# Altium PCB PCB_sonnn_2_2025-09-09.pcbdoc (part 2 of 2)
Units mm, origin at the board's own origin, x right, y up, seen from the top; angles counter-clockwise.
Board outline 165.65 x 105.65 mm, 2 copper layers (Top Layer, Bottom Layer); 104 components, 42 nets, 251 pads, 109 vias.
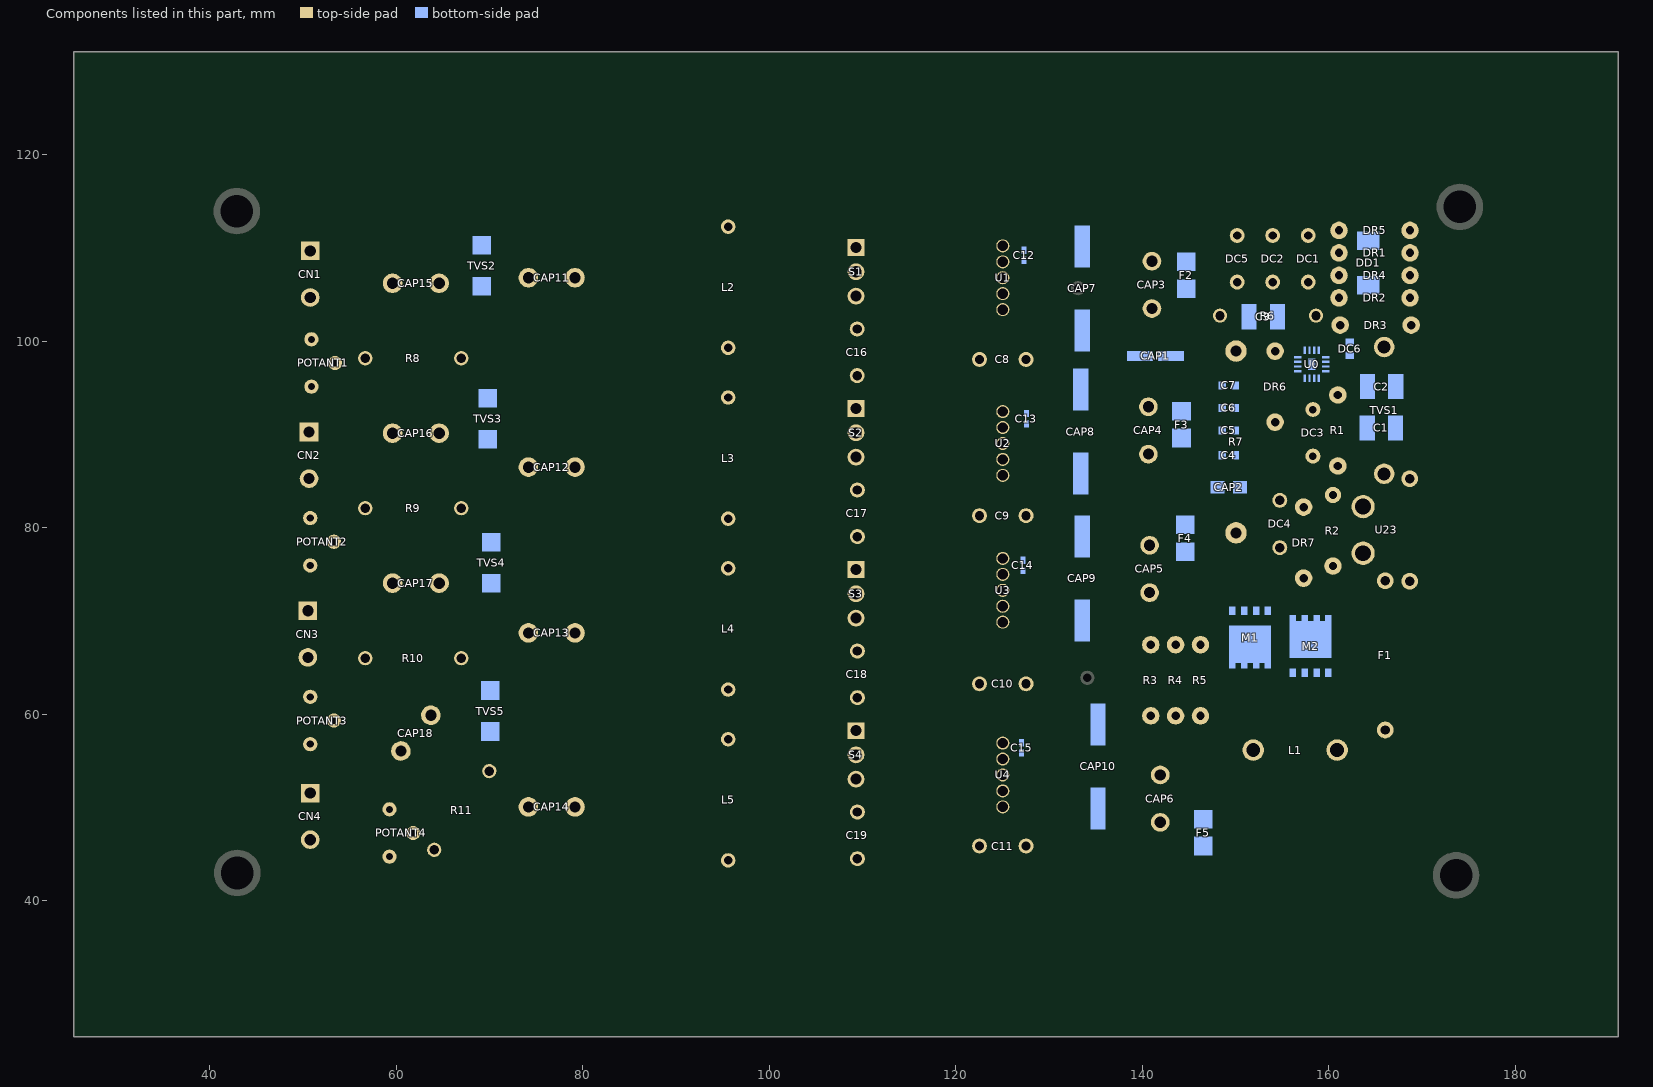
[diagram p2: the components of this part, seen from the top]

## Other copper
Top Layer:
  region net R4_2: 159.611,84.918 159.611,87.052 159.624,87.064 159.408,87.064 157.846,85.502
  region net R4_2: 158.531,85.185 158.696,84.982 158.531,85.147 158.531,85.185
  region net R4_2: 156.664,87.458 156.664,86.506 156.868,86.302 155.928,86.302 155.788,86.442
  region net R4_2: 159.903,88.131 159.117,88.917 160.424,88.779 159.903,88.258 159.903,88.131
  region net R2_1: 162.652,89.01 162.652,89.391 162.816,89.554 162.816,90.262 163.106,90.552 163.106,89.899 164.303,88.702
  region net R2_1: 163.189,86.458 163.189,87.232 165.366,88.111 164.03,88.301 163.113,88.541 163.062,88.541 161.906,87.385
  region net GND: 53.853,107.559 53.853,107.693 57.997,111.837 57.93,107.359 57.796,107.225
  region net GND: 114.832,106.667 114.832,106.601 118.308,103.125 114.297,103.125 114.163,102.991
  region net GND: 59.071,53.106 63.116,53.106 63.21,53.2 63.21,53.389 61.328,55.27
  region net GND: 54.736,60.366 58.406,60.058 58.474,59.991 58.474,59.754 57.932,55.825 56.658,55.533 54.541,54.348 55.68,56.215 55.527,57.993
  region net GND: 66.438,55.725 67.764,57.051 67.697,55.981 67.764,55.914 66.438,55.725
  region net GND: 105.515,50.83 108.026,53.335 107.726,50.078 107.867,49.937
  region net GND: 104.784,64.139 102.803,64.139 102.092,63.428 102.092,58.678 103.692,57.078 104.708,57.078 104.835,57.205
  region net GND: 90.866,63.955 90.96,63.955 93.97,66.965 90.301,66.965 89.925,67.342
  region net GND: 110.715,63.861 113.349,66.495 113.349,63.955 112.973,63.579
  region net GND: 90.801,70.144 90.707,70.238 90.662,74.846 95.364,70.144 90.801,70.144
  region net GND: 110.228,76.87 111.027,76.87 112.485,78.328 112.485,76.776 112.533,76.729
  region net GND: 114.461,68.592 114.298,72.988 118.6,68.686 114.555,68.686 114.461,68.592
  region net GND: 114.298,72.988 114.273,73.013 114.273,73.672 114.298,72.988
  region net VIN: 168.368,97.781 167.225,97.73 170.628,99.229 170.603,97.527 170.781,97.349
  region net VIN: 158.654,95.681 159.2,95.803 159.257,95.926 159.059,95.926 158.824,96.161
  region net ISNS+: 155.756,94.002 157.077,94.002 157.204,93.875 156.874,93.875 156.391,93.392
  region net ISNS+: 153.47,93.85 155.4,93.85 155.451,93.9 155.299,93.9 154.435,94.764
  region net U4_2: 56.539,43.286 55.999,43.673 55.967,44.822 61.567,49.922 63.367,49.922 67.067,47.022 67.053,44.011 66.332,43.213
  region net POTANT1_1: 62.767,107.022 63.367,107.622 63.467,107.622 69.667,107.622 70.467,106.822 70.467,106.522 70.467,103.922 69.367,102.722 63.367,102.722 62.767,103.322 62.767,103.422
  region net POTANT4_1: 64.967,64.322 70.167,64.422 71.367,63.722 71.367,61.722 70.867,61.222 67.967,61.222 65.167,58.222 63.367,58.222 62.467,59.122 62.667,62.222
  region net POTANT3_1: 64.167,80.722 71.067,80.722 71.767,79.522 71.767,77.222 71.267,76.722 68.867,76.722 66.467,73.622 65.367,72.422 62.967,72.422 63.067,79.522
  region net POTANT2_1: 64.167,96.922 70.067,96.922 71.667,95.522 71.667,92.522 71.167,92.022 68.267,92.022 66.367,90.122 66.367,88.922 65.267,87.722 62.867,87.722 62.967,95.422
  region net GND: 74.16,82.328 88.978,82.328 88.978,71.787 88.966,71.609 76.659,71.66 74.217,74.103 74.852,74.738
  region net GND: 74.795,91.853 74.16,92.488 74.16,102.521 88.47,102.521 88.978,103.029 88.978,91.853 74.795,91.853
  region net GND: 112.346,113.443 114.839,113.472 115.413,112.785 115.394,109.887 111.838,109.887 111.584,109.633
  region net GND: 111.965,77.375 112.346,110.014 115.394,110.014 114.905,84.884 117.223,80.207 115.229,77.801 112.381,77.712 112.286,77.154 111.772,77.185
  region net GND: 108.266,109.109 112.727,109.125 112.727,113.189 112.473,113.443 105.166,113.459 104.766,112.909 104.766,111.959 105.742,110.649 106.758,110.649
  region net GND: 113.743,50.832 126.466,50.809 126.467,47.922 123.067,43.522 113.489,43.466 113.108,43.847 111.076,45.879 109.933,45.879 107.266,48.546 112.473,48.546 114.427,46.677
  region net GND: 113.743,70.644 125.808,70.644 126.316,70.644 126.697,70.263 127.459,69.501 127.459,67.088 127.459,66.326 125.427,64.294 125.427,62.135 123.522,60.23 113.87,60.23 113.743,60.357 113.743,61.119
  region net GND: 116.301,86.374 126.189,86.392 127.078,85.503 127.078,83.344 123.903,80.169 115.013,80.169 114.378,80.804 114.378,82.836 114.166,84.509 114.417,85.387
  region net GND: 113.87,95.663 124.467,95.722 125.967,97.422 125.967,99.522 126.367,100.022 126.697,100.616 126.951,100.87 126.961,103.584 126.406,104.125 114.683,104.122 113.616,103.156 113.616,102.267 113.997,101.886
  region net GND: 61.579,106.082 62.256,107.657 63.205,108.351 61.274,108.995 61.037,108.757 60.665,108.757 60.597,108.69
  region net GND: 70.418,108.724 71.299,108.724 72.653,107.369 72.653,108.994 72.416,109.232
  region net GND: 72.789,105.439 75.937,105.87 77.587,103.839
  region net GND: 84.924,104.592 85.865,104.592 88.123,106.85 88.123,103.369 87.464,102.71
  region net GND: 84.736,109.39 87.653,107.79 87.653,110.519
  region net GND: 76.016,107.441 78.887,109.523 75.381,109.523 75.178,109.727
  region net GND: 61.041,93.37 60.878,106.578 61.132,106.832 58.719,106.832 56.433,104.546 56.433,95.275 56.941,94.767
  region net GND: 61.223,82.883 61.223,74.175 60.134,73.086 58.864,73.086 56.869,75.082 56.869,79.618 56.869,84.516 60.497,88.145 60.497,87.724 61.558,86.663
  region net GND: 76.131,87.757 76.131,87.884 78.417,90.17 76.131,90.17 75.242,91.059
  region net GND: 83.751,91.186 88.704,86.233 88.704,90.932 88.323,91.313 88.323,90.805 88.45,90.678
  region net GND: 85.021,81.915 85.021,82.677 87.688,85.344 87.688,81.407 88.323,80.772 87.815,80.772 87.18,80.137
  region net GND: 75.242,84.582 75.242,84.455 78.925,80.772 74.734,80.772 74.607,80.645
  region net GND: 76.047,68.302 76.047,71.124 77.787,72.865 73.836,72.865 73.037,72.281
  region net GND: 82.743,72.21 83.496,72.21 88.199,67.506 88.199,72.586 87.541,73.245
  region net GND: 82.038,60.733 84.06,60.733 88.764,65.437 88.764,62.097 84.907,58.24
  region net GND: 76.653,49.856 76.541,54.809 79.056,56.003 71.22,56.892 70.687,56.358
  region net GND: 82.586,56.385 83.245,56.385 86.255,53.374 86.255,56.761 85.973,57.043
  region net GND: 91.729,59.54 92.202,53.861 95.212,50.851 89.756,50.851 89.285,50.381 89.745,56.593
  region net GND: 105.605,66.726 108.201,68.79 106.604,68.79 106.005,69.389
  region net GND: 90.875,82.479 90.875,83.514 93.368,86.007 91.863,86.007 90.452,87.418
  region net GND: 103.879,83.849 103.879,83.316 104.21,82.986 104.514,82.986 104.997,82.503 106.927,82.503 107.613,83.189 107.613,83.29 105.175,85.729
  region net GND: 103.067,87.939 105.135,88.507 105.969,88.505 105.835,88.015 104.87,87.05
  region net GND: 110.23,91.84 111.583,91.653 112.418,90.973 112.418,92.751 111.928,93.241 110.132,93.241 110.041,93.15 110.041,93.132 107.126,92.004
  region net GND: 103.242,96.8 103.242,93.716 105.074,91.883 108.358,91.883 108.521,92.047
  region net GND: 110.286,98.684 111.405,98.684 111.829,99.107 111.829,99.314 112.45,99.935 112.45,97.123 112.544,97.028
  region net GND: 110.763,103.256 110.303,102.915 111.092,102.315 111.847,101.636 112.36,101.224 112.36,103.764 112.85,104.254
  region net GND: 110.857,105.717 112.478,107.189 112.478,105.32 111.498,104.34 111.498,104.957 110.954,105.502
  region net GND: 111.314,109.209 111.441,109.209 112.53,108.12 112.53,109.372 112.203,109.699
  region net GND: 111.129,88.253 111.129,88.431 112.323,89.625 112.323,88.152 112.145,87.974
  region net GND: 114.914,89.252 114.914,88.169 117.048,86.035 116.269,86.035 114.846,84.613 114.846,84.714
  region net GND: 114.914,93.046 117.962,97.753 114.508,97.753 114.169,97.414
  region net GND: 109.289,54.031 110.983,54.256 112.272,55.122 112.968,52.864 112.234,52.13
  region net GND: 110.833,57.202 112.274,56.006 112.328,57.737 112.347,57.756
  region net GND: 110.758,68.598 112.815,66.541 112.815,68.674 112.282,69.208
  region net GND: 110.733,71.214 110.733,71.265 112.612,73.145 112.612,70.96 112.257,70.605
  region net GND: 112.307,73.45 112.307,73.475 111.139,74.643 112.206,74.643 112.536,74.974
  region net GND: 110.646,82.965 110.646,82.39 112.272,80.764 112.272,83.372 112.678,83.778
  region net GND: 114.871,56.562 118.775,60.466 115.765,60.466 114.636,61.595
  region net GND: 114.636,53.834 114.636,53.787 118.634,49.788 114.683,49.788 114.025,49.13
  region net R5_2: 135.008,66.921 135.008,66.78 137.925,63.864 134.397,63.864 134.115,64.146
  region net ISNS-: 143.334,70.637 144.087,70.637 146.203,72.754 146.203,70.214 146.109,70.12
  region net GND: 141.251,72.153 142.711,72.153 144.502,73.944 141.924,73.944 141.911,73.931
Mid-Layer 1:
  region net U1_2: 49.166,95.809 49.666,95.809 53.366,99.509 54.066,99.509 54.866,98.709 54.866,94.609 54.766,94.509 53.266,93.009 49.366,93.009 48.466,93.909 48.466,95.309 48.966,95.809
  region net POTANT2_2: 49.039,76.632 49.539,76.632 53.239,80.332 53.939,80.332 54.739,79.532 54.736,77.215 55.241,76.288 56.665,74.871 53.139,73.832 49.239,73.832 48.339,74.732 48.339,76.132 48.839,76.632
  region net U3_2: 49.039,57.455 49.539,57.455 53.239,61.155 53.939,61.155 55.586,60.559 54.739,56.255 54.639,56.155 53.139,54.655 49.239,54.655 48.339,55.555 48.339,56.955 48.839,57.455
  region net U4_2: 56.473,43.297 55.978,43.729 55.966,44.809 61.566,49.909 63.366,49.909 68.374,46.21 68.366,44.781 66.966,43.309
  region net R2_1: 164.166,60.109 164.166,57.409 165.666,55.909 165.666,55.009 165.666,51.409 164.366,50.109 156.266,50.109 154.766,51.609 154.766,52.659 154.266,53.009 152.266,53.009 152.166,52.909 152.166,48.409 152.166,43.109 162.066,43.109 166.316,43.109 169.766,46.459 169.819,59.581 166.369,66.77 165.782,62.751 164.529,62.751 164.166,60.609 164.166,60.409 164.166,59.009
  region net R2_1: 152.266,48.509 152.266,43.109 150.477,43.109 149.366,44.261 149.466,49.109 141.266,56.809 138.266,59.809 138.266,62.409 138.566,62.709 141.666,62.709 142.166,62.209 142.166,61.109 142.166,58.817 148.866,52.609 151.866,52.609 152.266,53.009 152.266,48.509
  region net C4_2: 147.724,104.498 146.542,102.798 146.445,104.724 146.671,104.498 147.724,104.498
  region net C4_2: 146.276,102.419 146.276,103.049 146.326,103.099 146.276,102.419
  region net C4_2: 144.461,105.498 146.753,105.649 149.884,104.596 145.629,104.596 145.439,104.787
  region net C4_2: 155.823,104.121 156.312,103.811 156.384,103.344 156.136,102.978 157.714,102.806 157.523,104.101 157.523,104.114
  region net C4_2: 147.965,96.008 151.098,96.008 151.361,95.744 150.223,95.744 149.799,95.321 148.868,95.321 148.539,94.992
  region net C4_2: 147.886,93.29 150.132,94.061 152.272,96.172 152.272,97.087 152.297,97.112 152.196,97.1 151.561,96.465 151.561,96.287 151.129,95.855 148.411,95.855 147.979,95.423
  region net R5_2: 147.281,60.677 147.294,60.677 151.281,58.366 151.281,60.55 150.418,61.414
  region net R5_2: 149.146,63.95 151.323,63.333 149.835,62.698 149.618,62.916
  region net C4_2: 147.447,79.273 147.447,75.04 146.194,73.787 146.194,75.853 144.636,77.411
Mid-Layer 2:
  region net C4_2: 142.866,105.909 143.366,106.409 145.666,106.409 146.666,105.409 146.666,102.709 145.766,101.609 143.566,101.609 142.866,102.309 142.866,105.809 142.866,105.909
  region net C4_2: 148.866,95.909 149.066,95.709 149.066,87.409 148.866,87.209 147.666,87.209 144.866,87.309 142.566,88.709 142.566,90.109 143.166,90.809 146.966,90.809 146.966,95.409 147.466,95.909
  region net C4_2: 155.324,66.055 160.424,66.055 160.524,65.955 160.524,66.055 161.024,66.555 161.024,70.255 159.924,71.355 159.924,72.355 159.524,72.755 156.224,72.755 155.027,73.377 155.024,71.555 154.327,70.527 155.027,69.927 155.127,66.577
  region net C4_2: 143.466,78.909 142.866,78.509 142.866,77.709 141.966,76.609 141.966,76.209 146.066,76.209 146.766,76.809 146.766,78.409 146.166,78.909
  region net C4_2: 145.666,46.509 144.066,46.509 143.666,46.009 143.666,43.609 144.166,43.109 147.966,43.109 148.166,43.309 148.366,43.509 148.366,46.109 147.966,46.509
  region net R5_2: 148.666,68.909 149.266,69.709 149.366,69.809 153.866,69.809 154.227,69.177 154.227,62.527 154.166,62.009 154.112,59.116 153.464,58.483 145.766,58.509 144.966,59.409 144.966,59.609 144.866,59.709 144.866,61.909 145.866,62.909 145.866,64.909 146.166,65.209 147.766,65.209 148.666,66.009 148.666,66.209
  region net R2_1: 165.079,97.287 164.864,97.42 163.666,97.409 163.227,96.877 163.227,90.327 161.598,88.06 161.191,87.848 160.759,87.946 160.39,87.804 160.054,87.479 159.657,86.732 159.666,85.909 159.666,85.809 160.366,85.109 162.066,85.109 162.566,85.609 162.566,86.409 163.066,86.909 163.166,87.209 165.166,89.209
  region net POTANT1_1: 63.616,108.259 70.466,108.009 71.366,107.109 71.366,104.009 75.066,104.009 76.566,105.509 76.566,108.109 76.866,108.409 81.266,108.409 82.766,106.909 85.866,106.909 91.066,101.709 105.166,101.709 106.166,102.709 110.966,102.709 112.766,100.909 112.766,99.609 111.366,98.209 99.666,98.209 98.266,96.809 88.366,96.809 82.766,102.409 78.866,102.409 76.466,100.009 72.266,100.009 70.866,101.409 65.016,101.359 62.216,103.859 62.066,109.707
  region net POTANT2_1: 47.366,91.409 48.966,93.009 52.366,93.009 54.366,91.009 54.743,88.891 54.366,88.409 54.166,88.209 54.066,88.209 52.766,86.909 49.166,86.909 48.466,87.609 48.454,87.633 47.366,88.609 47.366,89.809
  region net POTANT2_1: 47.566,81.509 49.166,83.109 51.194,83.376 52.866,83.109 52.966,83.009 54.34,82.313 54.293,80.913 53.891,80.341 52.966,80.209 51.566,78.809 48.166,78.809 47.46,79.609
  region net POTANT2_1: 62.966,90.409 62.966,94.709 64.666,96.409 70.866,96.409 72.766,94.509 88.266,84.109 99.366,82.009 110.066,81.809 111.766,80.709 112.016,78.366 111.305,77.636 92.066,77.909 77.466,84.409 77.366,88.309 72.266,91.709 67.266,91.709 67.266,88.811 64.565,86.11 62.966,86.109
  region net POTANT3_1: 47.366,71.809 48.666,73.109 52.566,73.109 54.516,70.759 54.066,69.309 52.366,68.309 48.966,68.309 49.066,64.709 52.366,64.709 54.366,63.909 54.366,61.409 50.566,58.709 47.366,58.709
  region net F2_2: 124.766,112.609 124.066,112.209 124.066,111.409 124.266,111.209 126.466,111.209 126.466,110.209 126.766,109.909 127.666,109.909 128.728,108.971 128.766,101.109 126.266,101.109 126.366,96.009 126.716,95.659 131.566,98.309 131.528,111.735 130.942,112.281 128.166,112.309 127.766,112.609
  region net U2_5: 128.766,95.209 128.766,87.409 128.666,87.309 128.666,84.809 126.466,82.609 124.766,80.909 124.766,80.609 126.066,79.309 129.066,79.309 129.766,80.009 129.766,80.809 130.866,81.909 130.866,92.109 131.466,92.709 131.466,96.209 131.366,96.309 130.666,96.309
  region net F4_2: 125.066,64.909 125.066,65.309 128.666,68.909 128.666,75.409 128.666,76.309 127.666,77.609 128.866,78.709 131.066,78.209 131.166,78.209 131.966,77.409 131.966,72.709 132.066,72.609 132.066,65.209 131.366,64.509 131.366,62.909 129.266,60.809 125.966,60.809 125.566,61.209 125.566,62.509 125.066,63.009
  region net F5_2: 127.566,56.709 127.566,59.409 128.566,60.409 130.466,60.409 130.666,60.409 131.766,59.309 131.766,55.009 131.766,43.909 131.466,43.609 126.066,43.609 125.666,44.009 125.663,47.021 125.837,47.199 127.366,47.209 127.566,47.409
  region net S2_2: 107.666,91.209 108.116,91.359 110.166,91.359 110.616,90.959 110.666,89.409 110.216,88.959 108.066,88.959 107.666,89.209
  region net POTANT1_1: 56.196,104.774 56.196,106.857 58.228,108.889 55.002,108.915 53.783,110.134
  region net POTANT1_1: 53.275,107.746 50.836,107.695 49.058,106.908 48.779,107.518 51.776,110.312
  region net POTANT2_1: 61.419,87.456 63.688,88.844 63.688,87.659 63.248,87.219
  region net POTANT2_1: 55.569,88.201 57.296,88.201 58.515,86.982 57.347,86.982 56.483,86.118
  region net POTANT2_1: 52.622,86.956 53.105,86.956 53.994,86.067 53.994,85.432 53.207,84.645 53.029,84.645 52.851,84.467
  region net POTANT2_1: 67.005,90.747 67.005,90.772 68.402,92.169 67.209,92.169 66.751,92.626
  region net GND: 117.596,80.772 117.914,81.952 117.596,82.843 116.707,83.462 119.227,84.041 119.227,83.965 121.196,81.996
  region net GND: 106.159,61.046 109.308,61.046 109.359,61.097 109.359,58.099 109.283,58.023 105.168,58.023 104.381,58.811
  region net GND: 104.685,53.223 107.764,53.41 108.372,53.871 109.208,53.958 109.181,49.057 109.537,48.701 104.736,48.701 104.127,49.311 103.314,50.124 103.314,52.562 103.923,53.172
  region net GND: 109.225,58.199 111.67,58.199 114.916,61.444 110.542,61.444 109.883,62.103
  region net GND: 109.695,53.307 110.071,53.307 112.141,51.237 112.094,51.19 109.93,49.027
  region net GND: 119.704,84.812 119.704,85.015 121.024,86.336 125.122,86.336 125.563,85.895 124.851,85.895 121.668,82.712 121.6,82.644
  region net GND: 122.583,101.145 123.147,101.145 125.123,103.12 123.241,103.12 122.724,103.638 122.677,103.591
  region net F2_2: 126.27,101.09 126.288,101.09 130.007,104.809 130.007,101.053 129.191,100.237
  region net GND: 136.061,90.867 136.061,88.092 136.014,88.045 134.412,83.332 136.061,84.564 135.873,84.376 136.014,84.376 139.824,88.186 139.777,88.186
  region net GND: 119.248,48.509 123.457,48.509 123.493,48.472 123.493,48.164 121.28,45.951
  region net GND: 122.402,104.025 118.271,104.025 117.627,104.669 116.848,104.669 115.9,103.721 115.9,103.585 116.43,103.177 118.203,103.111 121.86,99.453
  region net GND: 119.156,95.288 119.156,101.206 122.026,98.158 119.156,95.288
  region net GND: 119.079,95.059 119.079,95.212 119.156,95.288 119.156,95.135 119.079,95.059
  region net GND: 78.16,99.098 79.938,100.876 82.503,100.876 85.069,98.31 85.069,97.142 85.704,96.507 85.704,96.202 85.831,96.075 85.831,95.085 85.323,94.577 81.132,94.577 77.474,98.234
  region net GND: 104.978,83.106 109.55,83.106 110.498,84.055 108.771,84.055 107.01,85.816
  region net GND: 109.55,85.917 109.652,85.917 111.379,84.19 108.873,84.19 108.636,84.427
  region net GND: 104.636,94.24 105.009,94.24 106.566,95.798 108.971,95.798 109.005,95.764 109.005,93.631 108.903,93.529
  region net R2_1: 158.927,76.227 158.927,75.277 159.727,74.477 161.227,74.477 161.977,75.227 161.977,76.677 160.627,78.027 160.227,78.027 157.877,80.377 156.577,80.627 155.577,81.577 154.227,81.577 153.277,82.327 153.327,83.627 154.327,84.527 158.877,84.527 159.177,84.827 160.077,84.827 160.377,85.127 160.377,87.127 160.077,87.427 160.027,87.427 159.227,86.627 152.177,86.477 151.277,85.927 151.227,81.627 152.527,80.177 155.627,79.127 156.877,78.127
Bottom Layer:
  region net U4_2: 56.527,43.127 55.927,43.677 55.966,44.809 61.566,49.909 63.366,49.909 67.066,47.009 67.027,44.127 66.427,43.077
  region net POTANT1_1: 62.766,107.009 63.366,107.609 63.466,107.609 69.666,107.609 70.466,106.809 70.466,106.509 70.466,103.909 69.366,102.709 63.366,102.709 62.766,103.309 62.766,103.409
  region net POTANT4_1: 64.966,64.309 70.166,64.409 71.366,63.709 71.366,61.709 70.866,61.209 67.966,61.209 65.166,58.209 63.366,58.209 62.466,59.109 62.666,62.209
  region net POTANT3_1: 64.166,80.709 71.066,80.709 71.766,79.509 71.766,77.209 71.266,76.709 68.866,76.709 66.466,73.609 65.366,72.409 63.377,72.427 62.927,72.927 63.066,79.509
  region net POTANT2_1: 64.166,96.909 70.066,96.909 71.666,95.509 71.666,92.509 71.166,92.009 68.266,92.009 66.366,90.109 66.366,88.909 65.266,87.709 63.227,87.727 62.877,88.177 62.966,95.409
  region net GND: 72.677,82.127 88.977,82.316 88.977,71.775 88.966,71.609 76.658,71.648 74.216,74.09 72.027,73.927 71.427,75.327 73.027,76.727
  region net GND: 74.794,91.841 74.159,92.476 74.159,102.509 88.469,102.509 88.977,103.017 88.977,91.841 74.794,91.841
  region net GND: 112.345,113.431 114.677,113.427 115.377,112.777 115.393,109.875 111.837,109.875 111.583,109.621
  region net GND: 111.964,77.363 112.345,110.002 115.393,110.002 115.393,77.363 111.964,77.363
  region net GND: 106.884,74.188 106.884,47.01 102.566,47.01 102.566,112.31 103.466,113.409 106.376,113.431 106.757,113.05 106.757,74.569 106.884,74.188
  region net GND: 108.266,109.109 112.726,109.113 112.726,113.177 112.472,113.431 105.216,113.459 104.766,112.909 104.766,111.959 105.741,110.637 106.757,110.637
  region net R2_1: 160.107,77.097 159.366,76.609 159.366,75.609 159.766,75.109 159.766,73.409 160.566,72.509 160.566,71.809 162.166,70.209 162.266,68.309 162.266,66.709 162.266,65.209 162.266,63.109 162.266,59.009 162.566,58.709 163.266,58.109 164.166,57.409 169.866,57.909 169.966,70.009 168.566,71.509 165.866,71.509 164.966,71.509 161.547,75.96 161.295,76.851
  region net C4_2: 155.366,65.909 160.466,65.909 160.566,65.809 160.566,65.909 161.066,66.409 161.066,70.109 159.966,71.209 159.966,72.209 159.566,72.609 156.266,72.609 156.166,72.509 155.066,71.409 155.066,66.309
  region net DR6_1: 154.266,92.709 154.75,92.229 155.02,92.007 155.366,91.409 155.366,85.009 156.166,83.709 155.966,82.209 155.166,81.609 154.166,81.609 152.566,83.209 152.566,91.809 153.466,92.709
  region net M1_4: 152.966,70.409 152.966,72.109 156.666,75.409 157.366,75.909 158.566,75.909 159.166,75.309 159.166,74.009 158.566,73.409 157.166,73.409 156.666,73.609 156.166,73.609 154.166,71.709 154.166,70.409 152.966,70.409
  region net U0_13: 155.466,65.409 156.366,65.409 156.766,65.009 156.766,63.409 156.366,62.909 155.466,62.909 155.066,63.409 155.066,65.009
  region net R4_2: 148.766,58.109 153.866,58.109 155.366,56.609 155.366,54.009 154.966,53.409 151.566,53.409 151.166,53.009 149.166,53.009 146.466,55.709 146.466,57.309 147.266,58.109
  region net C4_2: 144.316,46.809 143.666,46.009 143.666,43.609 144.166,43.109 147.966,43.109 148.166,43.309 148.366,43.509 148.366,46.109 147.966,46.909
  region net F5_2: 126.466,47.109 129.566,47.109 129.666,47.109 129.866,46.809 129.866,46.409 129.866,46.309 129.866,43.809 129.466,43.409 124.566,43.409 124.366,43.609 124.366,44.409 124.466,44.509
  region net U4_4: 126.466,55.909 126.466,56.109 126.666,56.309 127.666,56.309 127.766,56.209 127.866,56.109 127.866,54.909 127.766,54.809 127.566,54.609 127.466,54.509 126.666,54.509 124.466,54.509 124.166,54.709 124.166,55.509 124.466,55.909
  region net F5_2: 127.166,56.509 126.066,56.509 125.566,56.209 125.166,56.209 123.966,56.209 123.466,56.609 123.466,59.309 123.666,59.509 124.566,59.509 125.066,60.009 125.866,60.809 129.766,60.809 130.466,60.809 131.966,62.309 136.666,62.309 136.966,62.009 136.966,60.609 137.566,59.909 139.966,57.609 141.866,55.709 144.466,53.209 148.366,49.409 148.366,47.959 147.966,47.709 144.966,47.709 144.366,48.109 144.366,49.709 143.066,51.009 141.666,51.009 136.766,55.909 131.666,55.909 130.866,56.709 127.666,56.709 127.466,56.509
  region net F4_2: 126.666,61.109 125.966,61.909 125.966,64.109 127.266,65.309 129.666,65.309 130.466,64.509 130.466,62.709 129.366,61.909 128.166,61.109
  region net F2_2: 126.716,95.659 126.366,96.009 126.366,99.309 126.666,99.709 128.766,99.709 130.166,98.309 130.166,97.559
  region net F2_2: 123.666,109.409 128.666,109.409 129.066,109.409 131.616,107.459 143.366,107.459 145.777,107.477 146.166,107.909 146.166,111.509 144.366,113.309 123.866,113.409 122.166,112.509 122.166,110.109
  region net F4_2: 133.066,76.509 132.266,76.009 123.666,76.009 123.366,76.409 123.366,77.509 123.766,77.909 127.566,77.909 127.666,78.009 127.966,78.009 131.366,81.409 131.966,81.409 132.566,82.009 136.666,82.009 138.066,80.609 142.266,80.609 143.716,81.459 145.416,81.459 145.766,81.209 145.716,79.309 143.066,79.309 142.466,78.909 142.466,78.009 142.066,77.509 141.366,76.609 135.166,76.609 135.066,76.509 133.066,76.509
  region net U2_5: 128.066,78.809 127.866,78.609 125.266,78.609 124.566,79.309 124.566,80.009 126.666,82.109 126.866,82.109 126.966,82.209 129.766,82.209 129.766,80.509 128.066,78.809
  region net U2_5: 135.866,91.409 135.166,92.109 128.266,92.109 128.066,91.909 127.97,91.813 127.172,91.808 126.966,91.609 126.166,91.609 123.866,91.609 123.566,92.209 123.566,93.409 128.666,96.109 131.066,97.409 131.466,97.709 134.566,97.709 136.466,95.809 143.216,95.859 145.416,94.109 145.366,91.409 135.866,91.409
  region net R2_1: 165.079,97.041 164.772,97.397 163.666,97.409 162.666,96.409 162.666,93.309 162.666,90.609 159.566,88.009 159.666,85.909 159.666,85.809 160.366,85.109 162.066,85.109 162.566,85.609 162.566,86.409 163.066,86.909 163.166,87.209 165.166,89.209
  region net R2_1: 152.266,48.509 152.266,43.109 149.927,43.127 149.477,43.527 149.466,49.109 141.266,56.809 138.266,59.809 138.266,62.409 138.566,62.709 141.666,62.709 142.166,62.209 142.166,61.109 142.166,58.817 148.866,52.609 151.866,52.609 152.266,53.009 152.266,48.509
  region net R2_1: 164.166,60.109 164.166,57.409 165.666,55.909 165.666,55.009 165.666,51.409 164.366,50.109 156.266,50.109 154.766,51.609 154.766,52.659 154.266,53.009 152.266,53.009 152.166,52.909 152.166,48.409 152.166,43.109 162.066,43.109 166.316,43.109 169.766,46.459 169.866,60.709 167.666,61.709 167.166,61.709 165.266,61.709 164.166,60.609 164.166,60.409 164.166,59.009
  region net R5_2: 148.666,68.909 149.266,69.709 149.366,69.809 153.866,69.809 154.466,69.109 154.666,62.509 154.166,62.009 154.166,58.509 154.066,58.509 145.766,58.509 144.966,59.409 144.966,59.609 145.044,61.922 145.866,62.909 145.866,64.909 146.166,65.209 147.766,65.209 148.666,66.009 148.666,66.209
  region net R5_2: 157.066,65.009 157.366,65.409 160.266,65.409 160.666,65.009 160.666,59.209 162.166,57.409 163.566,55.709 163.566,53.809 163.566,53.109 162.966,52.409 159.566,52.409 158.266,52.409 155.866,54.809 155.866,56.709 154.066,58.509 151.566,58.509 151.566,62.109 152.066,62.609 157.066,62.609
  region net GND: 158.966,96.909 158.766,96.709 157.366,96.709 157.178,96.614 157.223,96.883 157.207,96.989 157.366,97.209 157.377,98.227 157.577,98.377 158.566,98.409 158.766,98.509 158.766,98.909 159.666,99.809 160.066,99.809 160.566,100.309 161.866,100.309 162.266,99.909 162.866,99.909 162.866,99.409 162.766,99.309 161.94,99.309 161.34,99.909 160.466,99.909 159.866,99.309 159.866,99.209 159.066,98.509 159.066,98.209 158.966,98.109 158.966,96.909
  region net GND: 158.046,97.409 158.192,97.556 157.971,97.409 158.046,97.409
  region net GND: 113.742,70.632 125.807,70.632 126.315,70.632 126.696,70.251 127.458,69.489 127.458,67.076 127.458,66.314 125.426,64.282 125.426,62.123 123.521,60.218 113.869,60.218 113.742,60.345 113.742,61.107
  region net GND: 113.869,95.651 124.466,95.709 125.966,97.409 125.966,99.509 126.366,100.009 126.366,100.609 126.696,100.604 126.95,100.858 126.932,104.16 114.724,104.117 113.615,103.144 113.615,102.255 113.996,101.874
  region net GND: 126.188,86.38 127.077,85.491 127.077,83.332 123.902,80.157 115.012,80.157 114.377,80.792 114.414,85.418 116.289,86.369
  region net GND: 113.742,50.82 126.95,50.82 125.977,47.777 122.527,43.527 113.488,43.454 113.107,43.835 111.075,45.867 109.777,46.077 107.265,48.534 112.472,48.534 114.16,46.955
  region net GND: 126.827,104.127 136.466,104.409 139.523,106.573 141.555,106.573 142.19,105.938 142.19,102.382 142.063,102.255 142.063,100.35 141.428,99.715 141.428,97.81 140.031,96.413 137.11,96.413 136.856,96.667 136.348,96.667 134.57,98.445 130.379,98.445 128.877,99.877 126.277,99.977 124.477,95.727 125.68,100.604 125.68,100.858
  region net GND: 126.066,86.609 129.876,86.609 132.797,89.53 140.544,89.53 140.671,89.485 144.971,86.885 144.971,85.485 142.266,85.509 137.369,82.672 125.558,82.672 124.288,83.942 123.78,83.942 123.653,84.069
  region net GND: 126.061,70.632 128.347,70.632 131.776,74.061 141.682,74.061 142.698,73.045 142.698,70.124 142.317,69.743 140.539,69.743 138.761,67.965 137.618,67.965 135.459,65.806 125.68,65.806 125.426,66.06 125.426,66.695 126.866,69.309
  region net GND: 126.696,69.108 126.696,67.965 126.823,67.838 129.109,67.838 129.363,68.092 129.363,69.87 127.077,69.87 126.696,70.251
  region net GND: 126.442,50.693 129.236,50.693 133.554,55.011 137.11,55.011 141.555,50.566 142.825,50.566 143.46,49.931 143.46,47.01 142.444,45.994 130.76,45.994 130.166,46.509 130.166,47.309 129.766,47.609 128.093,47.645 125.934,47.645 121.997,47.645 121.743,47.899 121.743,50.566 121.616,50.693 125.553,50.693 125.68,50.82
  region net GND: 139.142,74.061 139.142,75.712 139.269,75.839 151.461,75.839 152.096,75.204 152.666,74.409 152.666,70.709 152.223,70.124 139.904,70.124 139.904,70.251 137.999,72.156
  region net GND: 147.866,75.859 147.916,80.959 149.607,83.459 149.556,95.778 150.445,97.048 151.715,97.048 151.969,96.794 151.969,82.951 155.779,79.141 155.779,75.458 152.35,72.029 150.318,72.029 148.159,74.188
  region net GND: 165.685,96.311 165.685,88.539 165.685,88.158 163.399,85.872 163.399,84.602 161.666,82.209 155.366,79.409 160.605,79.776 160.605,79.141 161.494,79.014 161.566,79.009 163.566,80.009 164.466,80.309 167.766,80.409 168.966,81.109 170.338,82.555 170.511,96.667 170.257,96.921 166.206,96.921
  region net GND: 155.666,75.409 159.066,77.509 161.566,79.009 161.24,81.173 161.766,82.209 158.666,80.809 155.266,79.409 154.128,79.522 153.62,79.014 153.62,75.839 153.239,75.458
  region net GND: 158.804,99.514 158.851,99.814 159.066,100.109 159.866,100.109 160.066,99.909 160.466,99.559 159.366,98.759 158.818,98.638
  region net GND: 152.166,113.509 152.166,110.209 155.766,110.209 155.866,110.109 155.866,113.409 155.966,113.509
  region net GND: 152.366,113.509 152.366,113.309 152.366,112.509 152.366,110.409 152.166,110.209 152.166,110.109 152.666,109.609 155.166,109.609 155.866,108.909 155.866,113.509
  region net GND: 160.066,99.359 159.866,100.109 159.866,101.909 160.166,102.309 160.466,102.709 160.666,103.009 163.766,103.009 164.266,102.509 164.266,99.709 163.666,99.109 161.316,99.159 160.366,99.459
  region net F1_1: 162.133,76.923 162.154,78.3 163.704,79.097 169.166,79.109 170.266,78.109 170.266,73.409 169.366,72.509 165.366,72.509
  region net U0_11: 156.766,107.209 157.266,107.709 158.49,107.705 158.966,107.262 158.966,104.909 158.466,104.409 157.266,104.409 156.766,104.909
  region net C4_2: 143.716,106.559 142.866,105.709 142.866,102.309 143.566,101.609 145.666,101.609 145.866,101.909 146.666,102.709 146.666,105.409 145.716,106.609
  region net C4_2: 143.216,78.509 142.866,78.259 142.866,77.709 142.266,76.909 142.266,76.509 142.516,76.259 145.866,76.309 146.466,76.759 147.194,78.612 145.866,78.509
  region net ISNS-: 151.566,110.309 151.566,112.809 151.566,112.909 150.766,113.709 148.666,113.709 147.766,112.809 147.766,109.609 148.566,108.809 150.766,108.809 151.566,109.709
  region net ISNS+: 151.066,105.009 150.966,104.909 148.366,104.909 147.766,105.509 147.766,107.509 148.266,108.009 151.366,108.009 151.966,107.409 151.966,105.909 151.066,105.009
  region net U0_2: 154.566,105.109 152.966,105.109 152.566,105.509 152.566,107.309 152.966,107.709 154.666,107.709 155.066,107.309 155.066,105.609
  region net FB: 149.366,96.809 149.166,96.809 147.616,96.859 147.166,97.059 147.166,98.609 150.066,100.409 150.766,100.409 151.366,100.009 151.366,97.909 150.866,97.409 150.266,97.409 149.366,96.809
  region net ISNS-: 142.266,68.409 142.266,66.209 142.866,65.609 147.466,65.609 147.566,65.709 147.666,65.709 148.266,66.309 148.266,69.109 147.666,69.609 143.266,69.709 142.266,68.809
  region net ISNS+: 140.466,68.609 138.166,66.309 138.166,64.909 138.566,64.509 141.566,64.509 141.966,65.209 141.966,68.109 141.566,68.609
  region net R4_2: 142.566,60.909 143.066,61.409 144.166,61.409 144.666,60.909 144.666,59.109 144.666,59.009 145.566,58.109 147.266,58.109 147.266,57.909 147.566,57.609 147.566,56.709 146.466,55.609 146.266,55.609 142.766,59.109 142.566,59.309
  region net U0_11: 162.666,106.709 163.166,107.509 165.266,107.509 165.866,106.909 165.866,105.109 165.366,104.609 163.366,104.609 162.666,105.409
  region net DR2_1: 169.266,100.109 169.866,100.409 169.866,102.809 169.366,103.109 167.966,103.109 167.666,102.809 167.666,101.609
  region net GND: 158.366,90.409 155.766,93.109 155.166,93.709 155.016,95.959 155.916,96.409 156.28,96.965 157.217,96.986 157.319,96.759 156.585,95.903 156.597,95.191 157.579,94.138 160.766,92.409 160.766,91.909 159.666,90.809 159.666,90.509 159.566,90.409 158.366,90.409
  region net C4_2: 148.866,95.909 149.066,95.709 149.066,87.409 148.866,87.209 147.666,87.209 144.866,87.309 142.566,88.709 142.566,90.109 143.116,90.659 147.016,90.659 146.966,95.409 147.466,95.909
  region net C4_2: 155.324,66.055 160.424,66.055 160.524,65.955 160.524,66.055 161.024,66.555 161.024,70.255 159.924,71.355 159.924,72.355 159.524,72.755 156.224,72.755 156.124,72.655 155.024,71.555 155.024,66.455
  region net ISNS+: 158.32,96.462 158.32,95.657 158.283,94.705 158.126,94.487 158.306,94.173 158.586,94.314 158.566,95.652 158.559,96.459
  region net U0_10: 155.605,97.382 155.762,97.461 157.108,97.456 157.118,97.167 156.3,97.177 156.07,97.115 155.716,96.609 155.732,96.992 155.625,97.077 155.316,97.109
  region net R2_1: 143.089,98.445 143.089,98.832 144.866,100.609 146.819,100.609 146.948,100.48 146.948,99.492 146.666,99.209 146.366,98.909 146.366,97.759 145.966,97.409 143.166,97.409 143.166,98.367 143.089,98.445
  region net U0_13: 157.066,99.209 156.892,99.161 157.166,99.609 157.466,99.609 157.566,99.509 157.566,98.609 157.066,98.609 156.821,98.822
  region net FB: 159.286,96.931 160.104,96.942 160.822,96.959 160.956,96.892 160.997,96.838 161.032,96.715 161.022,96.636 160.971,96.555 160.856,96.467 160.675,96.481 160.089,96.681 159.293,96.687 159.266,96.809
  region net GND: 90.523,82.416 90.523,83.218 96.873,87.162 90.523,87.296 90.055,87.764
  region net GND: 98.945,87.429 96.94,87.095 103.29,82.483 103.624,87.296 103.424,87.496
  region net GND: 94.518,104.5 90.193,100.175 90.251,104.669 90.42,104.5 94.518,104.5
  region net GND: 90.183,99.352 90.183,100.165 90.193,100.175 90.183,99.352
  region net GND: 103.323,103.89 103.323,99.928 98.582,104.669 102.544,104.669 103.323,103.89
  region net GND: 89.878,94.61 90.691,94.61 95.568,89.734 89.743,89.734 89.201,89.192
  region net GND: 97.43,89.835 97.566,89.835 103.628,95.897 103.628,89.022 103.831,88.819
  region net GND: 91.011,74.672 91.212,74.672 95.156,70.728 90.143,70.728 89.274,69.859
  region net GND: 103.244,70.127 103.578,69.793 98.565,69.793 97.896,70.461 98.972,70.461 99.901,71.39 99.901,71.397 103.244,74.739 103.244,70.127
  region net GND: 90.784,61.14 90.784,62.081 96.052,67.349 91.724,67.349 89.984,69.09
  region net GND: 97.933,66.926 98.827,66.926 103.248,62.505 103.248,66.738 104.848,68.337
  region net GND: 89.15,57.006 90.09,57.006 96.581,50.515 88.585,50.515 87.55,49.48
  region net GND: 99.404,50.609 100.156,50.609 103.543,53.996 103.543,51.362 101.85,49.668
  region net GND: 76.03,67.923 76.627,70.574 78.441,71.84 77.028,72.967 75.595,73.965 75.595,73.203 74.071,71.679 74.089,71.679
  region net GND: 58.553,65.457 58.553,66.041 61.626,69.114 57.892,69.114 57.537,69.47
  region net GND: 83.01,61.07 84.515,61.07 87.996,64.551 87.996,61.823 85.456,59.283 85.456,59.189
  region net GND: 84.045,72.265 87.526,68.784 87.526,72.641 87.902,73.018
  region net GND: 84.327,90.327 84.327,90.045 87.902,86.47 87.902,90.892 88.09,91.08
  region net GND: 75.39,88.164 76.143,88.164 78.589,90.61 77.554,90.61 75.672,92.491 75.672,92.397
  region net GND: 76.155,86.293 76.155,83.88 78.314,81.721 74.834,81.721 73.843,82.711
  region net GND: 82.505,81.721 84.765,81.721 88.194,85.15 88.194,81.467 88.144,81.416
  region net GND: 85.277,104.427 86.012,104.427 87.75,106.165 87.75,103.558 87.951,103.357 84.742,103.357 84.208,103.892
  region net GND: 85.544,109.44 85.745,109.44 87.55,107.635 87.55,110.175 87.683,110.309
  region net GND: 75.852,107.702 76.12,107.702 77.991,109.574 76.521,109.574 75.585,110.509
  region net GND: 75.852,106.365 76.187,106.365 78.259,104.293 75.585,104.293 75.384,104.093
  region net GND: 57.555,101.162 53.773,105.16 53.698,105.16 51.817,107.042 51.958,107.042 52.616,106.383 53.773,105.16 60.472,105.16 58.261,102.949
  region net GND: 61.338,107.108 61.338,107.38 62.789,108.832 61.12,108.832 60.848,109.104
  region net GND: 70.809,108.614 71.19,108.614 72.768,107.036 72.768,109.267 73.113,109.612
  region net GND: 90.675,111.964 90.675,111.399 94.767,107.307 90.299,107.307 89.64,106.648
  region net GND: 99.55,108.065 99.951,108.065 102.892,111.006 102.892,106.26 103.093,106.059
  region net GND: 106.586,107.586 107.068,106.545 107.678,105.402 106.255,105.402 106.052,105.198
  region net GND: 108.262,109.11 108.262,109.059 106.535,107.332 106.535,110.939 106.662,111.066 106.986,110.643
  region net GND: 110.612,109.259 111.052,109.259 112.813,107.498 112.813,110.072 112.881,110.14
  region net GND: 111.289,105.568 111.289,105.805 112.779,107.295 112.779,105.06 112.17,104.45
  region net GND: 110.348,98.59 111.668,98.59 112.938,99.86 112.938,97.574 112.075,96.711
  region net GND: 106.207,100.445 106.207,99.657 107.706,98.159 106.436,98.159 106.182,97.905
  region net GND: 106.461,102.019 106.461,102.248 107.731,103.518 106.106,103.518 105.826,103.797
  region net GND: 111.414,103.061 111.694,103.061 112.862,101.892 112.862,103.645 112.837,103.67
  region net GND: 115,94.197 115,94.432 117.117,96.549 114.624,96.549 113.872,97.302
  region net GND: 115.087,88.854 115.087,88.515 117.627,85.975 115.3,85.567 113.36,84.282
  region net GND: 112.464,89.839 112.464,87.817 112.323,87.958 111.147,88.287 111.147,88.522 112.464,89.839
  region net GND: 111.053,92.144 110.912,92.041 112.699,90.874 112.699,92.85 112.793,92.944
  region net GND: 106.644,91.197 106.644,91.385 107.585,92.326 106.55,92.326 105.939,92.938
  region net GND: 106.409,89.88 107.679,87.999 106.174,87.999 106.033,88.14
  region net GND: 106.587,81.203 106.587,81.779 107.738,82.93 106.079,82.93 105.943,82.795
  region net GND: 112.243,82.871 112.243,83.066 112.276,83.1 112.276,83.032 112.412,82.897 112.243,82.871
  region net GND: 112.243,82.871 112.243,81.339 110.99,82.592 110.414,82.592 112.243,82.871
  region net GND: 106.485,78.968 106.485,78.663 107.975,77.173 106.655,77.173 106.384,76.902
  region net GND: 110.956,76.326 110.244,77.038 109.398,77.038 109.33,77.105 109.736,77.105 112.378,79.747 112.378,76.665 112.039,76.326 110.956,76.326
  region net GND: 111.498,75.24 111.498,74.171 112.701,72.968 113.035,72.968 113.503,73.436
  region net GND: 106.618,73.168 106.618,73.302 107.688,74.371 107.153,74.371 106.484,75.04 106.484,72.834 106.685,72.634
  region net GND: 106.685,72.233 107.688,71.23 106.217,71.23 106.083,71.096
  region net GND: 111.564,71.364 112.5,72.299 112.5,71.43 112.968,70.963
  region net GND: 111.03,68.824 111.03,68.69 112.834,66.885 112.834,69.091 112.701,69.225
  region net GND: 106.752,67.019 107.857,68.461 107.019,68.824 106.484,69.358 106.418,69.291
  region net GND: 105.554,65.844 105.453,65.945 105.453,67.282 105.554,65.844
  region net GND: 105.787,63.405 105.72,63.472 105.554,65.844 107.993,63.405 105.787,63.405
  region net GND: 110.666,63.673 112.672,65.678 112.672,63.272 112.538,63.138
  region net GND: 108.365,49.147 103.513,53.998 106.18,53.998 106.739,54.557 106.783,55.302 107.306,54.74 108.295,54.059 109.609,54.074 112.759,54.074 112.759,49.477 112.429,49.147 108.365,49.147
  region net GND: 106.537,55.927 106.537,56.054 107.879,57.397 106.9,57.397 106.519,57.778
  region net GND: 111.472,57.27 111.472,57.089 112.705,55.855 112.705,57.361 112.633,57.433
  region net GND: 111.49,53.75 111.49,54.095 112.451,55.057 112.451,53.66 112.361,53.569
  region net GND: 115.095,106.203 115.095,105.06 117.381,102.774 114.714,102.774 114.079,103.409 114.079,103.536
  region net GND: 117.381,80.549 117.381,79.914 114.841,77.374 114.841,80.422 114.46,80.803
  region net GND: 114.968,72.802 114.968,72.421 117.635,69.754 114.206,69.754
  region net GND: 114.587,57.816 114.714,57.816 117.762,60.864 115.73,60.864 114.333,62.261 114.333,58.451 114.079,58.197
  region net GND: 115.127,53.577 118.429,50.275 114.882,50.275 115.127,53.577
  region net GND: 114.469,50.196 114.46,50.069 114.46,50.196 114.469,50.196
  region net GND: 75.089,52.614 75.133,53.645 75.229,54.586 75.746,55.305 76.593,55.948 74.933,57.145 75.204,57.416 72.359,57.416 70.565,55.621
  region net GND: 81.31,55.934 83.523,55.934 85.9,53.557 85.9,56.533 85.555,56.877
  region net GND: 146.761,75.735 147.002,75.735 148.45,77.182 148.45,76.179 147.32,75.049
  region net GND: 164.139,101.386 164.139,101.549 164.774,102.184 164.393,102.184 164.031,102.547
  region net GND: 165.754,102.257 165.487,102.084 166.419,101.071 166.368,102.201 166.599,102.432
  region net GND: 167.649,96.83 167.903,96.83 168.589,97.515 168.589,96.804 168.513,96.728
  region net GND: 169.024,99.852 169.217,99.852 169.46,99.78 169.775,99.791 169.711,99.645 169.65,99.626 169.335,99.311
  region net VCC: 167.782,110.585 167.782,109.823 167.329,109.37 167.329,109.297 168.018,108.608 168.254,108.608 168.399,108.463 169.07,108.463 169.451,108.844 169.451,112.2 168.736,112.902 167.98,112.873 167.238,112.164 167.238,110.476 166.966,110.204
  region net GND: 154.285,80.26 157.993,80.26 158.197,80.057 157.841,80.057 155.682,77.898

## Silkscreen, mask and mechanical layers (free items; w line width, h text height)
Top Overlay:
  lines w0.75: 40.427,116.527 40.377,40.177 176.577,40.177 176.577,116.577 40.427,116.577
Bottom Overlay:
  lines w0.75: 40.427,116.527 40.377,40.177 176.577,40.177 176.577,116.577 40.427,116.577